# Altium PCB JLink-OB-HanYuan.PcbDoc
Units mil, origin at the board's own origin, x right, y up, seen from the top; angles counter-clockwise.
Board outline 737.79 x 1186.25 mil, 4 copper layers (Top Layer, GND, POWER, Bottom Layer), stack 61.811 mil thick; 24 components, 23 nets, 135 pads, 60 vias.
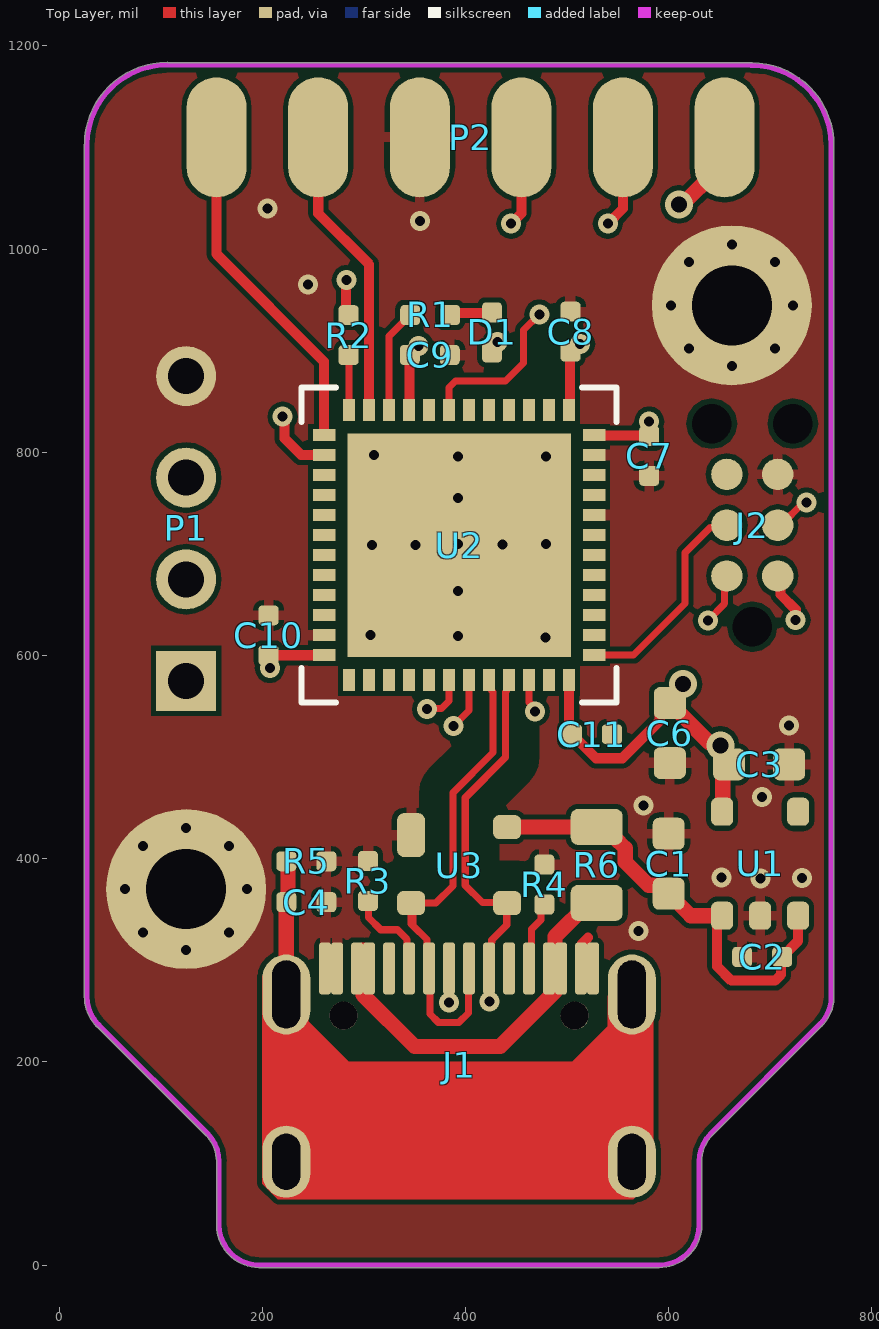
[diagram p0: Top Layer view]
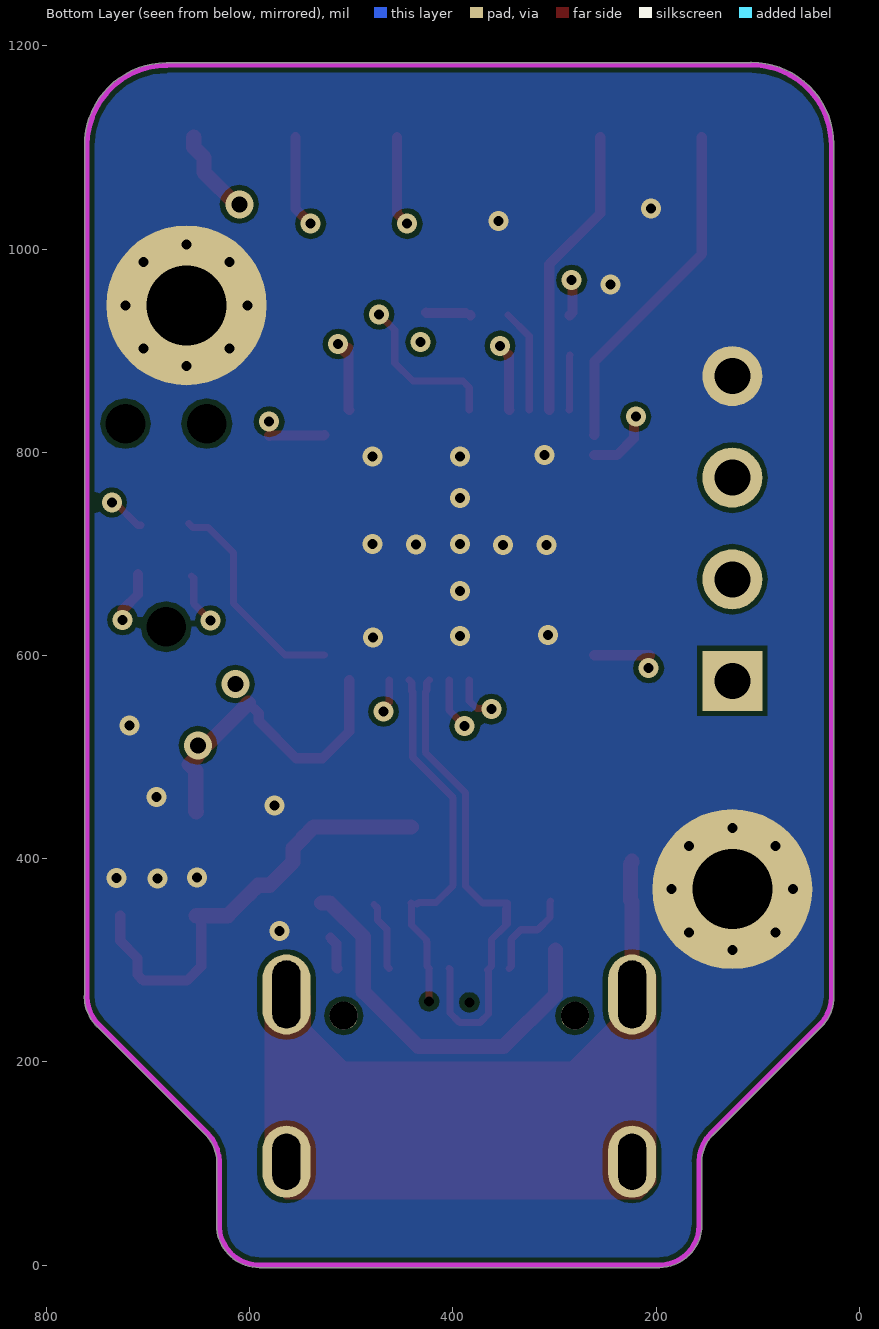
[diagram p1: Bottom Layer view, seen from below]
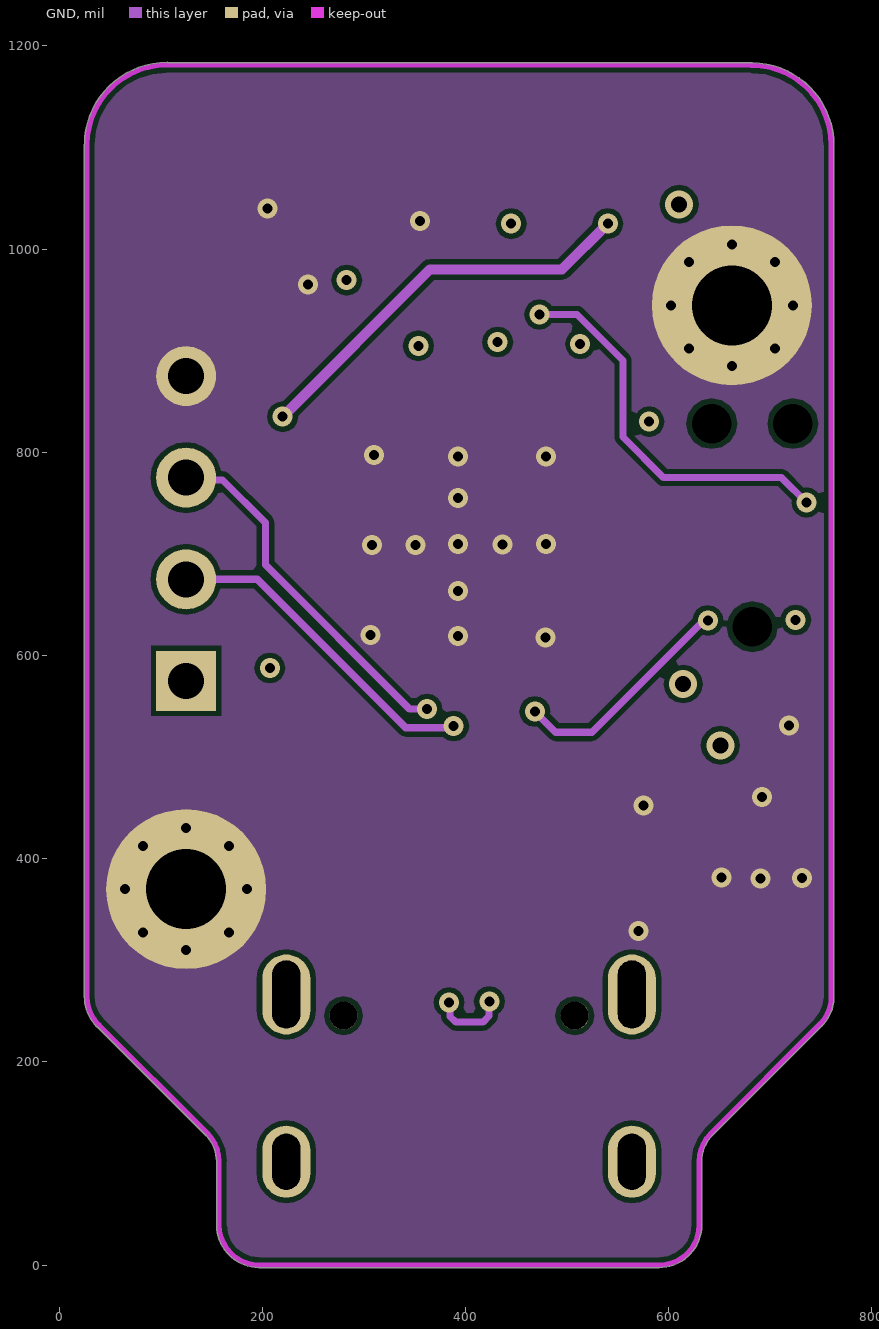
[diagram p2: GND]
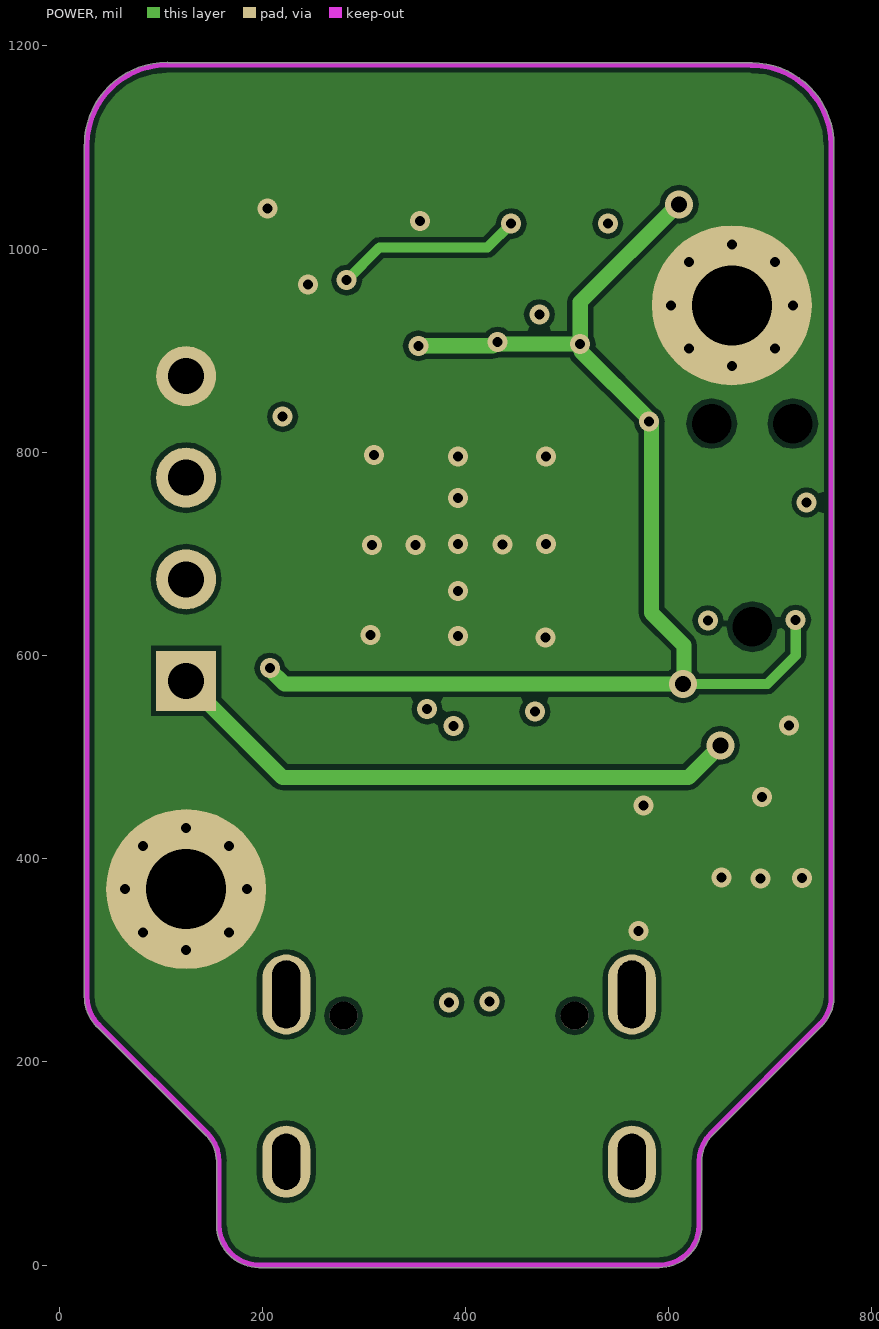
[diagram p3: POWER]

## Layer stack, top to bottom
Top Solder: solder mask 0.4, Solder Resist, Dk 3.5
Top Layer: signal copper 1.378
Dielectric 2: prepreg 7.874, PP-006, Dk 4.6
GND: signal copper 0.689
Dielectric 1: dielectric 41.9291, FR-4, Dk 4.6
POWER: signal copper 0.689
Dielectric 3: prepreg 7.874, PP-006, Dk 4.6
Bottom Layer: signal copper 1.378
Bottom Solder: solder mask 0.4, Solder Resist, Dk 3.5

## Board outline
154.97,101.74 cw(c157.48,101.74) 155.02,102.28 ccw(c118.17,101.74) 144.29,127.74 ccw(c118.17,101.74) 144.23,127.8 37.95,234.08 cw(c38.93,236.4) 37.15,234.62 cw(c66.77,264.24) 24.89,264.24 24.89,1102.48 cw(c27.4,1102.48) 25.01,1103.24 cw(c106.26,1102.48) 106.26,1183.73 cw(c106.26,1181.22) 107.01,1183.62 681.26,1183.62 cw(c681.26,1181.1) 682.18,1183.44 cw(c681.26,1102.19) 762.51,1102.19 762.51,265.48 cw(c760.16,264.6) 762.68,264.6 cw(c720.79,264.6) 762.51,260.93 762.51,260 cw(c760,260) 762.3,258.97 cw(c720.79,264.6) 752,236.67 cw(c750,238.19) 751.78,236.41 751.69,236.32 cw(c720.79,264.6) 750.41,234.98 cw(c748.63,236.76) 750.06,234.69 643.29,127.93 ccw(c669.35,101.87) 632.49,101.87 cw(c629.98,101.87) 632.44,101.34 632.44,39.94 cw(c629.98,39.41) 632.49,39.41 cw(c590.61,39.41) 590.61,-2.47 cw(c590.61,0.04) 590.48,-2.47 cw(c590,0) 590,-2.51 196.93,-2.51 cw(c196.93,0) 196.35,-2.45 cw(c196.93,39.44) 155.05,38.77 cw(c157.48,39.44) 154.97,39.44

## Design rules (kind name [scope] priority, off if disabled: settings)
Clearance Clearance_1 [InNetClass('USB') vs OnLayer('Top Layer')] p1: gap=5 ignorepadtopadclearanceinfootprint=FALSE except(0: Arc-Hole Track-Hole SMDPad-Hole THPad-Hole Via-Hole Fill-Hole Poly-Hole Region-Hole Text-Hole; 30: Arc-Poly Track-Poly SMDPad-Poly THPad-Poly Via-Poly Fill-Poly Poly-Poly)
Clearance [All] p2: gap=5 ignorepadtopadclearanceinfootprint=FALSE except(0: Arc-Hole Track-Hole SMDPad-Hole THPad-Hole Via-Hole Fill-Hole Poly-Hole Region-Hole Text-Hole)
DiffPairsRouting "Schematic Differential Pairs Routing_1" [InNet('D_N')] p1: maxlimit=5 minlimit=5 mostfreqgap=5 toplayer_minwidth=7 toplayer_maxwidth=7.2 toplayer_prefwidth=7.1 midlayer1_minwidth=7 midlayer1_maxwidth=7.2 midlayer1_prefwidth=7.1 midlayer2_minwidth=7 midlayer2_maxwidth=7.2 midlayer2_prefwidth=7.1 bottomlayer_minwidth=7 bottomlayer_maxwidth=7.2 bottomlayer_prefwidth=7.1 maxuncoupledlength=500
DiffPairsRouting [All] p2: maxlimit=4 minlimit=4 mostfreqgap=4 toplayer_minwidth=7 toplayer_maxwidth=7 toplayer_prefwidth=7 midlayer1_minwidth=7 midlayer1_maxwidth=7 midlayer1_prefwidth=7 midlayer2_minwidth=7 midlayer2_maxwidth=7 midlayer2_prefwidth=7 bottomlayer_minwidth=7 bottomlayer_maxwidth=7 bottomlayer_prefwidth=7 maxuncoupledlength=500
PolygonConnect [InNet('GND')] p1: thpad.connectstyle=Direct thpad.reliefconductorwidth=10 thpad.reliefentries=4 thpad.polygonreliefangle="90 Angle" thpad.airgapwidth=10 smdpad.connectstyle=Relief smdpad.reliefconductorwidth=10 smdpad.reliefentries=4 smdpad.polygonreliefangle="90 Angle" smdpad.airgapwidth=5 via.connectstyle=Direct via.reliefconductorwidth=10 via.reliefentries=4 via.polygonreliefangle="90 Angle" via.airgapwidth=10
PolygonConnect PolygonConnect_1 [All] p2: connectstyle=Relief reliefconductorwidth=10 reliefentries=4 polygonreliefangle="90 Angle" airgapwidth=10
RoutingVias [All] p1: holewidth=28 width=50 viastyle="Through Hole" minholewidth=28 minwidth=50 maxholewidth=28 maxwidth=50
SolderMaskExpansion [All] p1: expansion=4 istentingtop=FALSE
Width [All] p1: maxlimit=20 minlimit=4 preferedwidth=7 substack1={A1989989-DB36-47ED-A92B-DD306DA2B230} toplayer_{a1989989-db36-47ed-a92b-dd306da2b230}_minwidth=10 toplayer_{a1989989-db36-47ed-a92b-dd306da2b230}_maxwidth=10 toplayer_{a1989989-db36-47ed-a92b-dd306da2b230}_prefwidth=10 midlayer1_{a1989989-db36-47ed-a92b-dd306da2b230}_minwidth=10 midlayer1_{a1989989-db36-47ed-a92b-dd306da2b230}_maxwidth=10 midlayer1_{a1989989-db36-47ed-a92b-dd306da2b230}_prefwidth=10 midlayer2_{a1989989-db36-47ed-a92b-dd306da2b230}_minwidth=10 midlayer2_{a1989989-db36-47ed-a92b-dd306da2b230}_maxwidth=10 midlayer2_{a1989989-db36-47ed-a92b-dd306da2b230}_prefwidth=10 bottomlayer_{a1989989-db36-47ed-a92b-dd306da2b230}_minwidth=10 bottomlayer_{a1989989-db36-47ed-a92b-dd306da2b230}_maxwidth=10 bottomlayer_{a1989989-db36-47ed-a92b-dd306da2b230}_prefwidth=10 minimp=50.000000 maximp=50.000000 favimp=50.000000
29 further rules are at their usual default settings.

## Classes and differential pairs
net class USB: D_N D_P
differential pair class usb: D
differential pair D: +D_P -D_N

## Components (designator, comment, footprint, x,y, rotation, side; value= is the part's Value field where it differs from the comment)
C1 "1uF" C0603 600,395 r270 top
C2 "100nF" C0402 691.95,303.29 r0 top
C3 "1uF" C0603 688.96,492.75 r180 top
C4 "100nF" C0402 243.37,357.23 r180 top
C6 "10uF" C0603 601.09,523.66 r90 top
C7 "100nF" C0402 580.81,796.51 r90 top
C8 "100nF" C0402 503.38,918.67 r270 top
C9 "100nF" C0402 364.8,895.77 r180 top
C10 "100nF" C0402 206.18,619.86 r270 top
C11 "100nF" C0402 524.44,522.45 r180 top
D1 "LED0" LED0402 426.1,917.96 r90 top
J1 "USB type-c Connecter" USB-C-SMD_KH-TYPE-C-16P 393.7,196.85 r0 top
J2 "TC2030-IDC" JLINK_6PIN_ADAPTOR 682.26,628.22 r90 top
P1 "Header 4" HEADER-4 125,875 r0 top
P2 "Header 6" header-6 655,1110 r180 top
R1 "220R" R0402 365.28,935.13 r0 top
R2 "220R" R0402 284.89,915.22 r90 top
R3 "5.1K" R0402 303.98,378.07 r90 top
R4 "5.1K" R0402 477.59,374.52 r270 top
R5 "10K" R0402 243.37,397.45 r0 top
R6 "6V/500mA" R0805 529.15,393.84 r270 top
U1 "XC6219B332MR-G" SOT-23-5_L3.0-W1.7-P0.95-LS2.8-BR 690,395 r270 top
U2 "STM32F072C8U6TR" UFQFPN48-7X7MM 393.7,708.66 r270 top
U3 "PRTR5V0U2X" SOT-143_L2.9-W1.3-P1.92-LS2.3-BL 393.7,393.7 r270 top

## Footprints (in the part's own frame and the unit in brackets; to place one, negate y for a bottom-side part, rotate by r counter-clockwise, add the part's x,y. Pads: shape width x height; smd on the part's side, far side on the other; paste and mask are expansions set on the pad)
C0402 [mm]
  rrect40% 0.5x0.5 smd: 0(0.5,0) 1(-0.5,0)
  body extent -0.5,-0.25 0.5,0.25, height 0.56
C0603 [mm]
  rrect40% 0.8x0.8 smd mask+0.1: 0(0.75,0) 1(-0.75,0)
  body extent -0.8,-0.42 0.8,0.44, height 0.95
HEADER-4 [mm]
  rect 1.5x1.5 hole 0.9: 1(0,-7.62)
  round 1.5 hole 0.9: 2(0,-5.08) 3(0,-2.54) 4(0,0)
  body extent -1.32,-8.92 1.22,1.24, height 5.94
header-6 [mm]
  oval 1.5x3 smd: 1(0,0) 2(2.54,0) 3(5.08,0) 4(7.62,0) 5(10.16,0) 6(12.7,0)
  body extent -1.34,-7.44 13.9,1.44, height 1.54
JLINK_6PIN_ADAPTOR [mil]
  round 30.98 smd paste-393.7: 1(50,-25) 2(50,25) 3(100,-25) 4(100,25) 5(150,-25) 6(150,25)
  round 0 hole 39.02 unplated: ""(0,0) ""(200,-40) ""(200,40)
LED0402 [mm]
  rrect40% 0.5x0.5 smd: 1(-0.5,0) 2(0.5,0)
  body extent -0.5,-0.3 0.5,0.3, height 0.2
R0402 [mm]
  rrect40% 0.5x0.5 smd: 0(0.5,0) 1(-0.5,0)
  body extent -0.5,-0.25 0.5,0.25, height 0.35
R0805 [mm]
  rrect40% 0.9x1.3 smd: 0(0.95,0) 1(-0.95,0)
  body extent -1.1,-0.75 1.11,0.75, height 1.24
SOT-23-5_L3.0-W1.7-P0.95-LS2.8-BR [mm]
  rrect50% 0.7x0.55 smd: 1(1.3,-0.95) 2(1.3,0) 3(1.3,0.95) 4(-1.3,0.95) 5(-1.3,-0.95)
  body extent -1.25,-1.5 1.25,1.5, height 1.1
SOT-143_L2.9-W1.3-P1.92-LS2.3-BL [mm]
  rrect50% 1.1x0.7 smd: 1(-0.75,-1.2)
  rrect50% 0.6x0.7 smd: 2(0.95,-1.2) 3(0.95,1.2) 4(-0.95,1.2)
  body extent -1.45,-1.18 1.45,1.18, height 1.22
UFQFPN48-7X7MM [mil]
  rect 22x12 smd: 1(-132.87,108.3) 2(-132.87,88.6) 3(-132.87,68.91) 4(-132.87,49.22) 5(-132.87,29.53) 6(-132.87,9.84) 7(-132.87,-9.85) 8(-132.87,-29.53) 9(-132.87,-49.22) 10(-132.87,-68.91) 11(-132.87,-88.61) 12(-132.87,-108.3) 25(132.87,-108.3) 26(132.87,-88.6) 27(132.87,-68.91) 28(132.87,-49.22) 29(132.87,-29.53) 30(132.87,-9.85) 31(132.87,9.84) 32(132.87,29.53) 33(132.87,49.22) 34(132.87,68.91) 35(132.87,88.61) 36(132.87,108.3)
  rect 12x22 smd: 13(-108.3,-132.87) 14(-88.6,-132.87) 15(-68.91,-132.87) 16(-49.22,-132.87) 17(-29.53,-132.87) 18(-9.85,-132.87) 19(9.84,-132.87) 20(29.53,-132.87) 21(49.22,-132.87) 22(68.91,-132.87) 23(88.61,-132.87) 24(108.3,-132.87) 37(108.3,132.87) 38(88.6,132.87) 39(68.91,132.87) 40(49.22,132.87) 41(29.53,132.87) 42(9.84,132.87) 43(-9.85,132.87) 44(-29.53,132.87) 45(-49.22,132.87) 46(-68.91,132.87) 47(-88.61,132.87) 48(-108.3,132.87)
  rect 220x220 smd paste-110: 49(0,0)
  silkscreen extent -155,-155 155,155, body extent -138,-138 138,138, height 22
USB-C-SMD_KH-TYPE-C-16P [mm]
  oval 1.2x2 hole 0.7 slot 1.7 at 90 deg: 1(-4.32,1.765) 2(4.32,1.765)
  oval 1.2x1.8 hole 0.7 slot 1.4 at 90 deg: 3(-4.32,-2.415) 4(4.32,-2.415)
  rrect50% 0.3x1.3 smd: A1(-3.35,2.415) A4(-2.55,2.415) A5(-1.25,2.415) A6(-0.25,2.415) A7(0.25,2.415) A8(1.25,2.415) A9(2.55,2.415) A12(3.35,2.415) B1(3.05,2.415) B4(2.25,2.415) B5(1.75,2.415) B6(0.75,2.415) B7(-0.75,2.415) B8(-1.75,2.415) B9(-2.25,2.415) B12(-3.05,2.415)
  round 0.7 hole 0.7 unplated: ""(-2.89,1.235) ""(2.89,1.235)
  body extent -4.47,-5.08 4.47,2.82, height 3.2

## Part data
C1 C2 C3 C4 C6 C7 C8 C9 C10 C11: library part Capacitance
  C1 C3: Componet=GRM185R61E105KA12D
  C2 C4 C7 C8 C9 C10 C11: Componet=GRM155R11C104KA88D
  C6: Componet=GRM188R61E106MA73D
D1: "Typical INFRARED GaAs LED", Componet=16-213/GHC-YR1S1/3T, LatestRevisionDate=08-Jul-2005, LatestRevisionNote="Mech Layer 1 removed.", PackageDescription="LED; 2 Leads", PackageReference=LED-0, Published=8-Jun-2000, Publisher="Altium Limited"
J2: "J-Link 6-pin Programming Pads", Componet=TC2030-IDC
P1: "Header, 4-Pin", Componet=2.54mm, LatestRevisionDate=17-Jul-2002, LatestRevisionNote="Re-released for DXP Platform.", Publisher="Altium Limited"
P2: "Header, 6-Pin", Componet=2.54mm, LatestRevisionDate=17-Jul-2002, LatestRevisionNote="Re-released for DXP Platform.", Publisher="Altium Limited"
R1 R2 R3 R4 R5 R6: library part Resistance
  R1 R2: Componet=AC0402FR-07220RL
  R3 R4: Componet=RC0402JR-075K1L
  R5: Componet=AC0402DR-0710KL
  R6: Componet=PICOSMDC050S-2
U1: library part XC6219B332MR, Componet=XC6219B332MR
U2: "No Description Available", Built_By=EMA_Jessica, Copyright="Copyright (C) 2018 Accelerated Designs. All rights reserved", Manufacturer_Part_Number=STM32F072C8U6TR, RefDes=RefDes, SourceLibrary=STMicroelectronics_2020-10-07, Type=DEV, Vendor=STMicroelectronics
J1: Componet=KH-TYPE-C-16P
U3: Componet=PRTR5V0U2X

## Free pads (board coordinates)
  round 157.48 hole 78.74 paste-39.37: 2(125,370) 2(662.19,944.69)

## Via types
v1: diameter 19.68, hole 9.84, Top Layer to Bottom Layer, tented both sides, 55 vias
v2: diameter 27.56, hole 15.75, Top Layer to Bottom Layer, tented both sides, 3 vias
v3: diameter 19.68/19.68/19.68/0 (per signal layer), hole 9.84, Top Layer to Bottom Layer, tented both sides, 2 vias

## Nets (pads, with @x,y where several pads share a name; then routed paths per layer and width w, separated by ;. In a path a pad name is that pad's centre, name@x,y a point inside that pad or via, vN(x,y) a via of type N, cw(c..) or ccw(c..) an arc to the next point about the centre after c; other vN are vias at no path point)
#RESET: P2.5 U2.11 | length 289.2
  Top Layer w10: P2.5 255,1035 305.1,984.9 U2.11
#RESET_OB: J2.3 U2.7 | length 581.1
  Top Layer w7: U2.7 383.86,863.86 390,870 439.28,870 457.18,887.9 457.18,920.22 v1(472.63,935.67) ; J2.3 710.24,728.22 732.57,750.55 v1(735.55,750.55)
  GND w7: v1(472.63,935.67) 509.7,935.67 555,890.37 555,815 595,775 711.09,775 v1(735.55,750.55)
CTS: U2.17
D_N: J1.A7 J1.B7 U2.32 U3.2 | length 511.1
  Top Layer w7: U3.2@348.29,350.48 348.29,333.99 ; J1.A7 402.92,291.31 402.92,248.18 393.67,238.93 373.14,238.93 364.99,247.08 364.99,289.77 365.66,290.44 J1.B7 361.95,294.16 361.95,320.33 ; U2.32 425.74,573.29 425.74,565.57 427.12,564.19 427.12,504.36 387.7,464.95 387.7,373.25 370.75,356.3 U3.2 346.46,350.48 346.46,335.82 348.29,333.99 ; 348.29,333.99 361.95,320.33 ; 348.29,333.99 361.95,320.33
D_P: J1.A6 J1.B6 U2.33 U3.3 | length 439
  Top Layer w7: v3(423.47,259.47) 423.35,259.59 423.35,291.81 J1.B6 425.64,294.34 425.64,317.93 425.83,318.12 425.83,319.99 440.6,334.77 440.6,355.96 U3.3 ; U3.3@435.02,355.62 433.91,356.72 416.66,356.72 399.7,373.69 399.7,459.98 439.47,499.75 439.47,564.19 440.43,565.14 440.43,573.29 U2.33
  GND w7: v3(383.83,258.54) 384.83,257.54 384.83,244.78 390.53,239.08 417.2,239.08 423.15,245.03 423.15,259.14 v3(423.47,259.47)
GND: C1.1 C2.1 C3.1 C4.1 C6.1 C7.1 C8.1 C9.1 C10.1 C11.1 J1.A1 J1.A12 J1.B1 J1.B12 J2.5 P1.4 P2.4 pad.2 R3.0 R4.1 R5.0 U1.2 U2.8 U2.23 U2.35 U2.44 U2.47 U2.49 U3.1 | length 33.2
  Top Layer w10: J1.B1 514.69,292.84 514.69,316.42 520.54,322.28
  other v1: 125,310 82.57,327.57 167.43,327.57 570.49,328.72 65,370 185,370 690.55,380.55 731.17,381.03 651.88,381.64 82.57,412.43 167.43,412.43 125,430 575.33,452.21 691.83,460.94 718.22,531.08 478.8,617.5 392.82,619.11 306.52,619.96 392.82,663.37 307.81,708.94 350.75,708.94 436.19,709.38 392.77,709.59 479.14,709.82 392.82,754.95 392.82,795.7 479.07,795.93 309.94,797.11 662.19,884.69 619.76,902.26 704.61,902.26 602.19,944.69 722.19,944.69 245,965 619.76,987.11 704.61,987.11 662.19,1004.69 355.34,1027.77 205,1040
NetD1_2: D1.2 R1.0 | length 39.2
  Top Layer w10: R1.0@382.5,934.85 R1.0@382.77,935.12 ; R1.0@387.61,937.13 426.07,937.13 D1.2@426.34,937.4
NetJ1_A5: J1.A5 R3.1 | length 93
  Top Layer w7: R3.1 304.39,357.98 304.39,342.14 316.53,330 333.18,330 342.56,320.62 342.56,293.86 J1.A5
NetJ1_B5: J1.B5 R4.0 | length 69.1
  Top Layer w7: J1.B5 465.01,294.34 465.01,330.48 474.36,339.84 474.36,351.61 R4.0
NetR1_1: R1.1 U2.10 | length 102.2
  Top Layer w7: U2.10 324.79,914.18 345.59,934.99 R1.1
NetR2_1: R2.1 U2.12 | length 54.2
  Top Layer w7: R2.1 285.15,895.28 285.15,841.79 U2.12
PGND: C4.0 J1.1 J1.2 J1.3 J1.4 R5.1 | length 132.4
  Top Layer w15: J1.1@223.66,266.37 C4.0 ; C4.0 225.24,358.78 225.24,394.62 223.69,396.17 R5.1
RTS: U2.16
RXD: P1.2 U2.31 | length 376.1
  Top Layer w7: v1(388.32,530.55) 403.55,545.77 U2.31
  GND w7: P1.2 195,675 341.19,528.81 386.59,528.81 v1(388.32,530.55)
SWCLK: P2.3 R2.0 | length 310
  Top Layer w10: v1(283.08,969.4) 282.33,968.66 282.33,937.47 R2.0 ; v1(445,1025) 455,1035 P2.3
  POWER w10: v1(283.08,969.4) 315.22,1001.54 421.54,1001.54 v1(445,1025)
SWCLK_OB: J2.4 U2.37 | length 216.4
  Top Layer w7: U2.37 565.37,600.37 616.06,651.06 616.06,701.06 641.12,726.12 656.12,726.12 J2.4@660,730
SWDIO: P2.2 U2.14 | length 557.7
  Top Layer w10: v1(220,835) 221.85,833.15 221.85,813.78 238.37,797.27 U2.14 ; v1(540,1025) 555,1040 P2.2
  GND w10: v1(220,835) 365,980 495,980 v1(540,1025)
SWDIO_OB: J2.2 U2.34 | length 312.6
  Top Layer w7: U2.34 462.62,553.88 468.23,548.26 v1(468.23,544.83) ; v1(638.53,634.5) 655,650.98 655,675.96 J2.2
  GND w7: v1(468.23,544.83) 488.59,524.47 524.47,524.47 632.08,632.08 632.67,632.08 v1@640,639.41
SWO: P2.6 U2.13 | length 336.9
  Top Layer w10: P2.6 155,995 260.77,889.23 U2.13 U2.13
TXD: P1.3 U2.30 | length 401.4
  Top Layer w7: v1(362.16,547.15) 362.77,547.76 376.32,547.76 383.86,555.3 U2.30
  GND w7: P1.3 127.24,772.76 160.93,772.76 202.98,730.7 202.98,689.21 345.04,547.15 v1(362.16,547.15)
USB_5V: J1.A4 J1.A9 J1.B4 J1.B9 R6.0 | length 386.1
  Top Layer w15: J1.A4@299.06,310 299.06,265.94 350,215 434.08,215 488.2,269.12 J1.A9@488.2,291.59 ; J1.A9@488.54,291.93 J1.A9@488.2,291.59 ; R6.0 521.27,356.44 488.2,323.37 J1.A9@488.2,291.59
VCC_3V3: C3.0 C6.0 C7.0 C8.0 C9.0 C10.0 C11.0 D1.1 J2.1 P1.1 P2.1 U1.5 U2.1 U2.9 U2.24 U2.36 U2.48 | length 2548.8
  Top Layer w10: C10.0 206.28,600.27 260.73,600.27 U2.24 ; U2.9 344.8,841.86 344.8,895.45 C9.0 C9.0@345.47,895.42 ; U2.36 502,525.21 528.35,498.86 554.35,498.86 591.14,535.64 591.14,543.24 C6.0 ; U2.1 502.69,842.23 502.69,898.29 C8.0 ; C8.0@503.04,902.64 C8.0@506.79,898.88 ; U2.48 526.96,816.57 580.43,816.57 C7.0 ; J2.1@710,680 710,660 725,645 v1(725,635)
  Top Layer w15: C6.0 605.21,549.07 640.31,513.97 651.03,513.97 651.24,514.18 651.24,500.95 C3.0 653.11,486.42 653.11,446.69 U1.5 ; v2(610.24,1044.08) 613.63,1044.08 645,1075.45 645,1090 655,1100 P2.1
  POWER w10: v2@619.81,571.91 696.91,571.91 725,600 v1(725,635)
  POWER w15: P1.1 220,480 619.31,480 v2(650.88,511.57) ; v1(207.33,587.57) 207.33,586.31 221.73,571.91 v2(614.13,571.91) ; v1(353.59,904.84) 426.81,904.84 430.39,908.42 v1(431.66,908.42) ; v1@431.66,906.51 v1(512.93,906.51) ; v1@582.98,830.09 582.08,830.09 578.47,833.7 578.47,834.68 513.82,899.33 513.82,905.61 v1(512.93,906.51) ; v1@583.06,830.09 583.06,641.94 615,610 v2@615,577.68 ; v2@610,1045 512.93,947.93 v1(512.93,906.51)
  other v1: 580.81,830.09
VCC_5V: C1.0 C2.0 R6.1 U1.1 U1.3 U3.4 | length 444.2
  Top Layer w10: U1.1 647.6,338.82 647.6,294.05 661.64,280 704.61,280 710.47,285.86 710.47,302.12 C2.0 727.4,319.06 U1.3
  Top Layer w15: U3.4 441.02,431.17 R6.1 R6.1 537.02,431.25 547.24,421.03 547.24,420.27 557.25,410.26 557.25,396.83 580.35,373.72 591.75,373.72 C1.0 621.65,343.82 U1.1
pads on no net: J1. J1.A8 J1.B8 J2. J2.6 U1.4 U2.2 U2.3 U2.4 U2.5 U2.6 U2.15 U2.18 U2.19 U2.20 U2.21 U2.22 U2.25 U2.26 U2.27 U2.28 U2.29 U2.38 U2.39 U2.40 U2.41 U2.42 U2.43 U2.45 U2.46

## Polygon pours and split planes (outlines as drawn)
GND on GND "GND_L02_P001" (solid, remove dead copper, pour order 1): -40,1220 -40,-55 -30,-65 810,-65 820,-55 820,1220
GND on POWER "GND_L03_P002" (solid, remove dead copper, pour order 2): -40,1220 -40,-55 -30,-65 810,-65 820,-55 820,1220
GND on Bottom Layer "GND_L04_P003" (solid, remove dead copper, pour order 3): -40,1220 -40,-55 -30,-65 810,-65 820,-55 820,1220
GND on Top Layer "GND_L01_P000" (solid, remove dead copper, pour order 0): -40,1220 -40,-55 -30,-65 810,-65 820,-55 820,1220

## Keep-outs
Keep-Out Layer:
  lines w5: 27.4,1102.48 27.4,264.24 ccw(c66.77,264.24) 38.93,236.4 ; 27.52,1102.48 cw(c106.26,1102.48) 106.26,1181.22 ; 39.06,236.53 146.01,129.58 cw(c118.17,101.74) 157.54,101.74 ; 106.26,1181.1 681.26,1181.1 ; 157.48,39.44 157.48,101.74 ; 157.56,39.44 ccw(c196.93,39.44) 196.93,0.07 ; 196.93,0 590,0 ; 590.61,0.04 ccw(c590.61,39.41) 629.98,39.41 ; 629.92,39.92 629.92,101.87 ; 629.98,101.87 cw(c669.35,101.87) 641.51,129.71 750,238.19 ; 681.26,1180.93 cw(c681.26,1102.19) 760,1102.19 760,275.24 760,260 ; 748.63,236.76 ccw(c720.79,264.6) 760.16,264.6

## Other copper
Top Layer:
  region net PGND: 200,285 200,80 215,65 565,65 585,85 585,270 575,280 555,280 540,265 540,235 505,200 285,200 245,240 245,255 245,285

## Silkscreen, mask and mechanical layers (free items; w line width, h text height)
Bottom Solder:
  drawing of 2058 lines, arcs and shapes, not listed
  text "SWO" at 144.41,1074.74 h40 r270
  text "RST" at 244.24,1074.81 h40 r270
  text "GND" at 342.56,1074.81 h40 r270
  text "CLK" at 442.17,1074.81 h40 r270
  text "DIO" at 542.17,1074.81 h40 r270
  text "3V3" at 643.88,1074.81 h40 r270
  text "GND" at 42.89,937.77 h40 r180
  text "hanyuan.xyz" at 230,888.68 h60 r180
  text "TXD" at 48.88,836.61 h40 r180
  text "RXD" at 42.22,736.61 h40 r180
  text "3V3" at 48.24,642.41 h40 r180
  text "JLink-OB Hy ver1.0" at 191,527.04 h53 r180
  text "S" at 320.16,454.55 h53 r180
  text "E" at 355.19,454.55 h53 r180
  text "G" at 386.06,454.55 h53 r180
  text "G" at 425.06,454.55 h53 r180
  text "E" at 465.36,454.55 h53 r180
  text "R" at 498.26,454.55 h53 r180
Mechanical 1:
  lines w0.5: 2493.91,-1650.28 ccw(c2030.66,80464.53) 2501.14,-1650.24

## Text inside footprints (layer, text, board x,y; h text height)
U2: Mechanical 7 "Default Padstyle: RX12Y22D0T" at 0.83,1058.66 h50 r270; Mechanical 7 "Heat Tab Padstyle: RX220Y220D0T" at -59.17,1096.16 h50 r270; Mechanical 7 "Alt 1 Padstyle: OX60Y90D30P" at -179.17,1046.16 h50 r270; Mechanical 7 "Alt 2 Padstyle: OX90Y60D30P" at -239.17,1046.16 h50 r270; Mechanical 7 "0.02in/0.5mm" at 479.65,445.79 h25 r270; Mechanical 7 "0.02in/0.508mm" at 656.57,666.16 h25 r270; Mechanical 7 "0.266in/6.75mm" at 731.57,796.16 h25 r270; Mechanical 7 "0.266in/6.75mm" at 381.2,370.79 h25 r270; Mechanical 7 "0.28in/7.112mm" at 381.2,1171.54 h25 r270; Mechanical 7 "0.28in/7.112mm" at 80.83,796.16 h25 r270; Mechanical 13 "*" at 486.84,833.04 h50 r270